# Altium PCB PCB1.PcbDoc
Units mil, origin at the board's own origin, x right, y up, seen from the top; angles counter-clockwise.
Board outline 787.4 x 787.4 mil, 2 copper layers (Top Layer, Bottom Layer); 6 components, 7 nets, 22 pads, 0 vias.
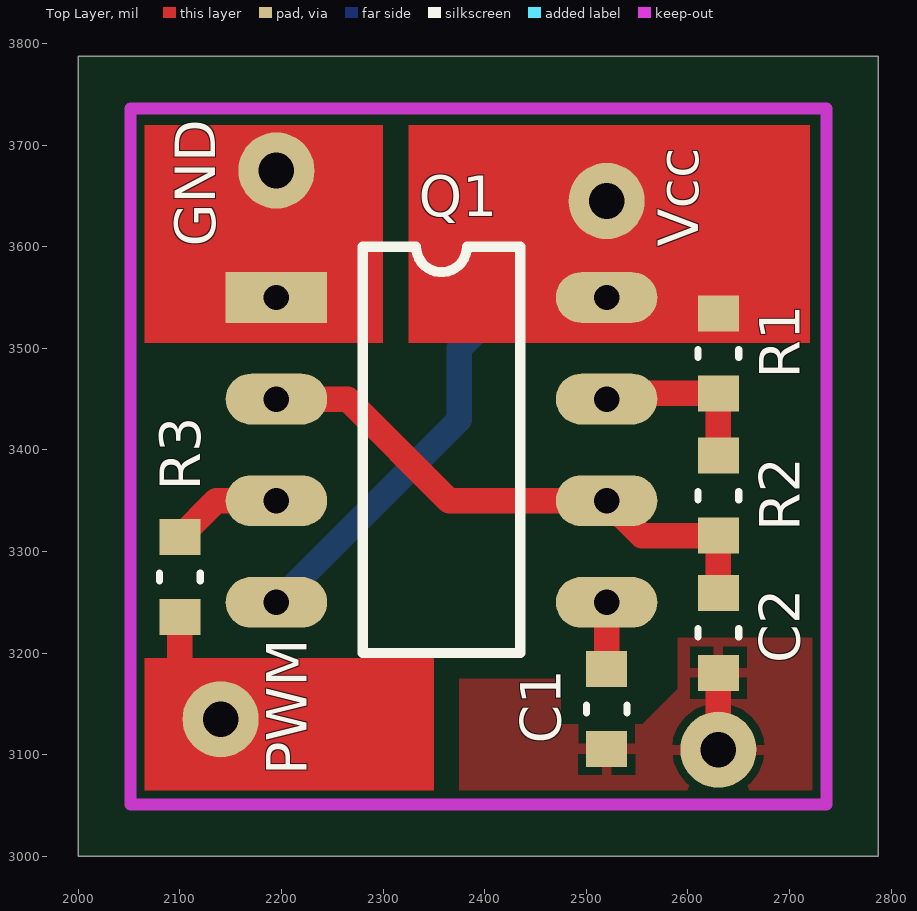
[diagram p0: Top Layer view]
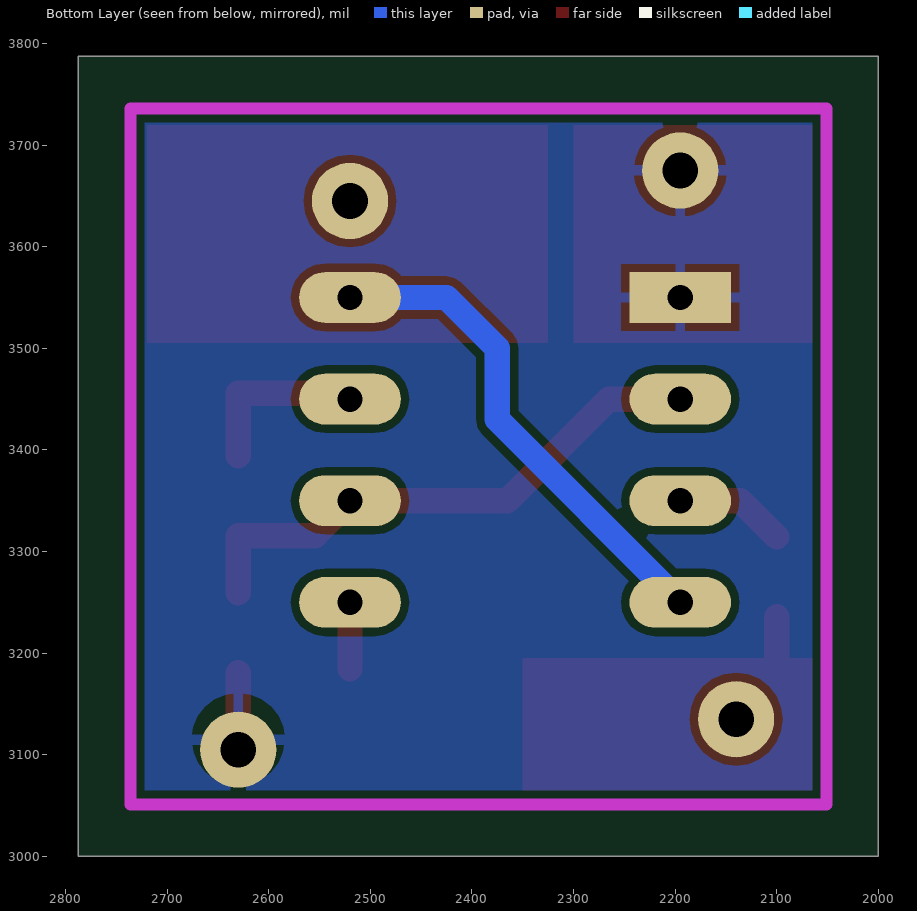
[diagram p1: Bottom Layer view, seen from below]

## Layer stack, top to bottom
Top Layer: signal copper 1.4
Dielectric: core 12.6, FR-4, Dk 4.8
Bottom Layer: signal copper 1.4

## Board outline
2000,3000 2787.4,3000 2787.4,3787.4 2000,3787.4

## Design rules (kind name [scope] priority, off if disabled: settings)
Clearance [All] p1: gap=7.87
PolygonConnect [All] p1: connectstyle=Relief reliefconductorwidth=10 reliefentries=4 polygonreliefangle="90 Angle"
RoutingVias [All] p1: holewidth=23.62 width=39.37 viastyle="Through Hole" minholewidth=28 minwidth=50 maxholewidth=28 maxwidth=50
SilkscreenOverComponentPads [All] p1: minsilkscreentomaskgap=10
SolderMaskExpansion [All] p1: expansion=4
Width [All] p1: maxlimit=50 minlimit=7.87 preferedwidth=7.87
27 further rules are at their usual default settings.

## Components (designator, comment, footprint, x,y, rotation, side; value= is the part's Value field where it differs from the comment)
C1 "0603" 0603 2520,3145 r90 top
C2 "0603" 0603 2630,3220 r90 top
Q1 "555_Timer" DIP8 2195,3550 r0 top
R1 "0603" 0603 2630,3495 r90 top
R2 "0603" 0603 2630,3355 r90 top
R3 "0603" 0603 2100,3275 r90 top

## Footprints (in the part's own frame and the unit in brackets; to place one, negate y for a bottom-side part, rotate by r counter-clockwise, add the part's x,y. Pads: shape width x height; smd on the part's side, far side on the other; paste and mask are expansions set on the pad)
0603 [mm]
  rect 0.9x1.02 smd: 1(-1,0) 2(1,0)
  silkscreen extent -0.1,-0.51 0.1,0.51, body extent -0.89,-0.46 0.89,0.46, height 0.9
DIP8 [mil] "8-pin Dual in-line package"
  rect 100x50 hole 25: 1(0,0)
  oval 100x50 hole 25: 2(0,-100) 3(0,-200) 4(0,-300) 5(325,-300) 6(325,-200) 7(325,-100) 8(325,0)
  silkscreen extent 85,-350 240,50, body extent 74,-345 252,45, height 200

## Part data
C1 C2: library part Capacitor, "0603 capacitor"
Q1: library part 555_Timer_PDIP
R1 R2 R3: library part Resistor, "0603 resistor"

## Free pads (board coordinates)
  round 75 hole 35: 0(2140,3135) 0(2195,3675) 0(2520,3645) 0(2630,3105)

## Nets (pads, with @x,y where several pads share a name; then routed paths per layer and width w, separated by ;. In a path a pad name is that pad's centre, name@x,y a point inside that pad or via, vN(x,y) a via of type N, cw(c..) or ccw(c..) an arc to the next point about the centre after c; other vN are vias at no path point)
GND: C1.1 C2.1 pad.0@2195,3675 pad.0@2630,3105 Q1.1 | length 200.6
  Top Layer w25: Q1.1 pad.0@2195,3675 ; pad.0@2630,3105 C2.1
NetC1_2: C1.2 Q1.5 | length 65.6
  Top Layer w25: C1.2 Q1.5
NetQ1_3: Q1.3 R3.2 | length 109.8
  Top Layer w25: R3.2 2135.63,3350 Q1.3
NetQ1_7: Q1.7 R1.1 R2.2 | length 173.6
  Top Layer w25: Q1.7 2525.63,3455.63 R1.1 R2.2
PWM: pad.0@2140,3135 R3.1 | length 117.2
  Top Layer w25: R3.1 2100,3175 pad.0@2140,3135
TRIG: C2.2 Q1.2 Q1.6 R2.1 | length 546.9
  Top Layer w25: Q1.2 2265,3450 2365,3350 Q1.6 2554.37,3315.63 R2.1 C2.2
VCC: pad.0@2520,3645 Q1.4 Q1.8 R1.2 | length 807.1
  Top Layer w25: 2415,3645 2520,3645 2530,3635 2625,3635 2630,3630 R1.2
  Bottom Layer w25: Q1.4 2375,3430 2375,3500 2425,3550 Q1.8

## Polygon pours and split planes (outlines as drawn)
GND on Bottom Layer "Top Layer-No Net" (solid, pour order 2): 2055,3730 2730,3730 2730,3060 2055,3060 2055,3730
GND on Top Layer "Top Layer-No Net" (solid, pour order 10): 2475,3175 2475,3065.23 2474.77,3065 2375,3065 2375,3175 2475,3175
GND on Top Layer "Top Layer-No Net" (solid, pour order 8): 2725,3215 2725,3055 2475,3055 2475,3130 2555,3130 2575,3150 2590,3165 2590,3215 2725,3215

## Keep-outs
Keep-Out Layer:
  lines w11.81: 2051.18,3051.18 2051.18,3736.22 2736.22,3736.22 2736.22,3051.18 2051.18,3051.18

## Other copper
Top Layer:
  rectangle net VCC: 2325,3505 2720,3720
  rectangle net GND: 2065,3505 2300,3720
  rectangle net PWM: 2065,3065 2350,3195

## Silkscreen, mask and mechanical layers (free items; w line width, h text height)
Top Overlay:
  text "GND" at 2135,3600 h40 r90
  text "Vcc" at 2610,3600 h40 r90
  text "PWM" at 2225,3080 h40 r90

## Dimensions
2051.18,3051.18 to 2051.18,3736.22 on Mechanical 1
2051.18,3051.18 to 2736.22,3051.18 on Mechanical 1